# Altium PCB Power Amplifier.PcbDoc
Units mil, origin at the board's own origin, x right, y up, seen from the top; angles counter-clockwise.
Board outline 6000 x 4000 mil, 2 copper layers (Top Layer, Bottom Layer); 21 components, 15 nets, 67 pads, 0 vias.
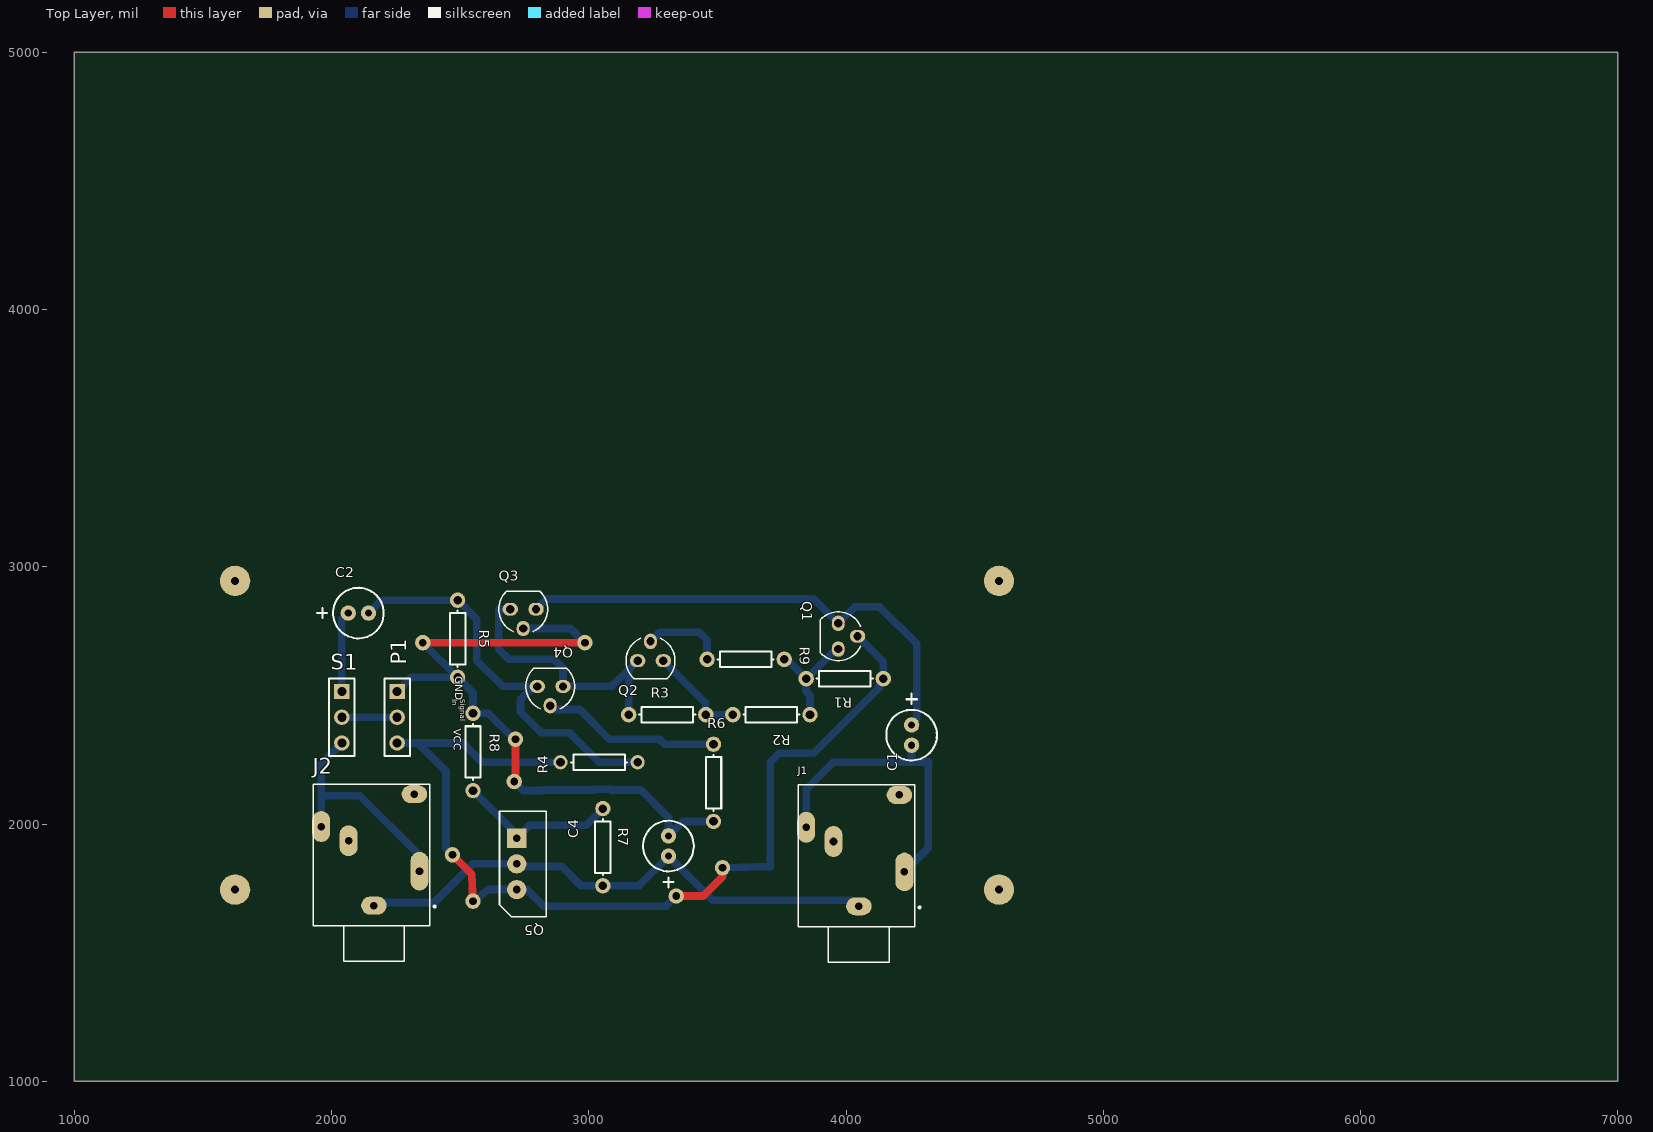
[diagram p0: Top Layer view]
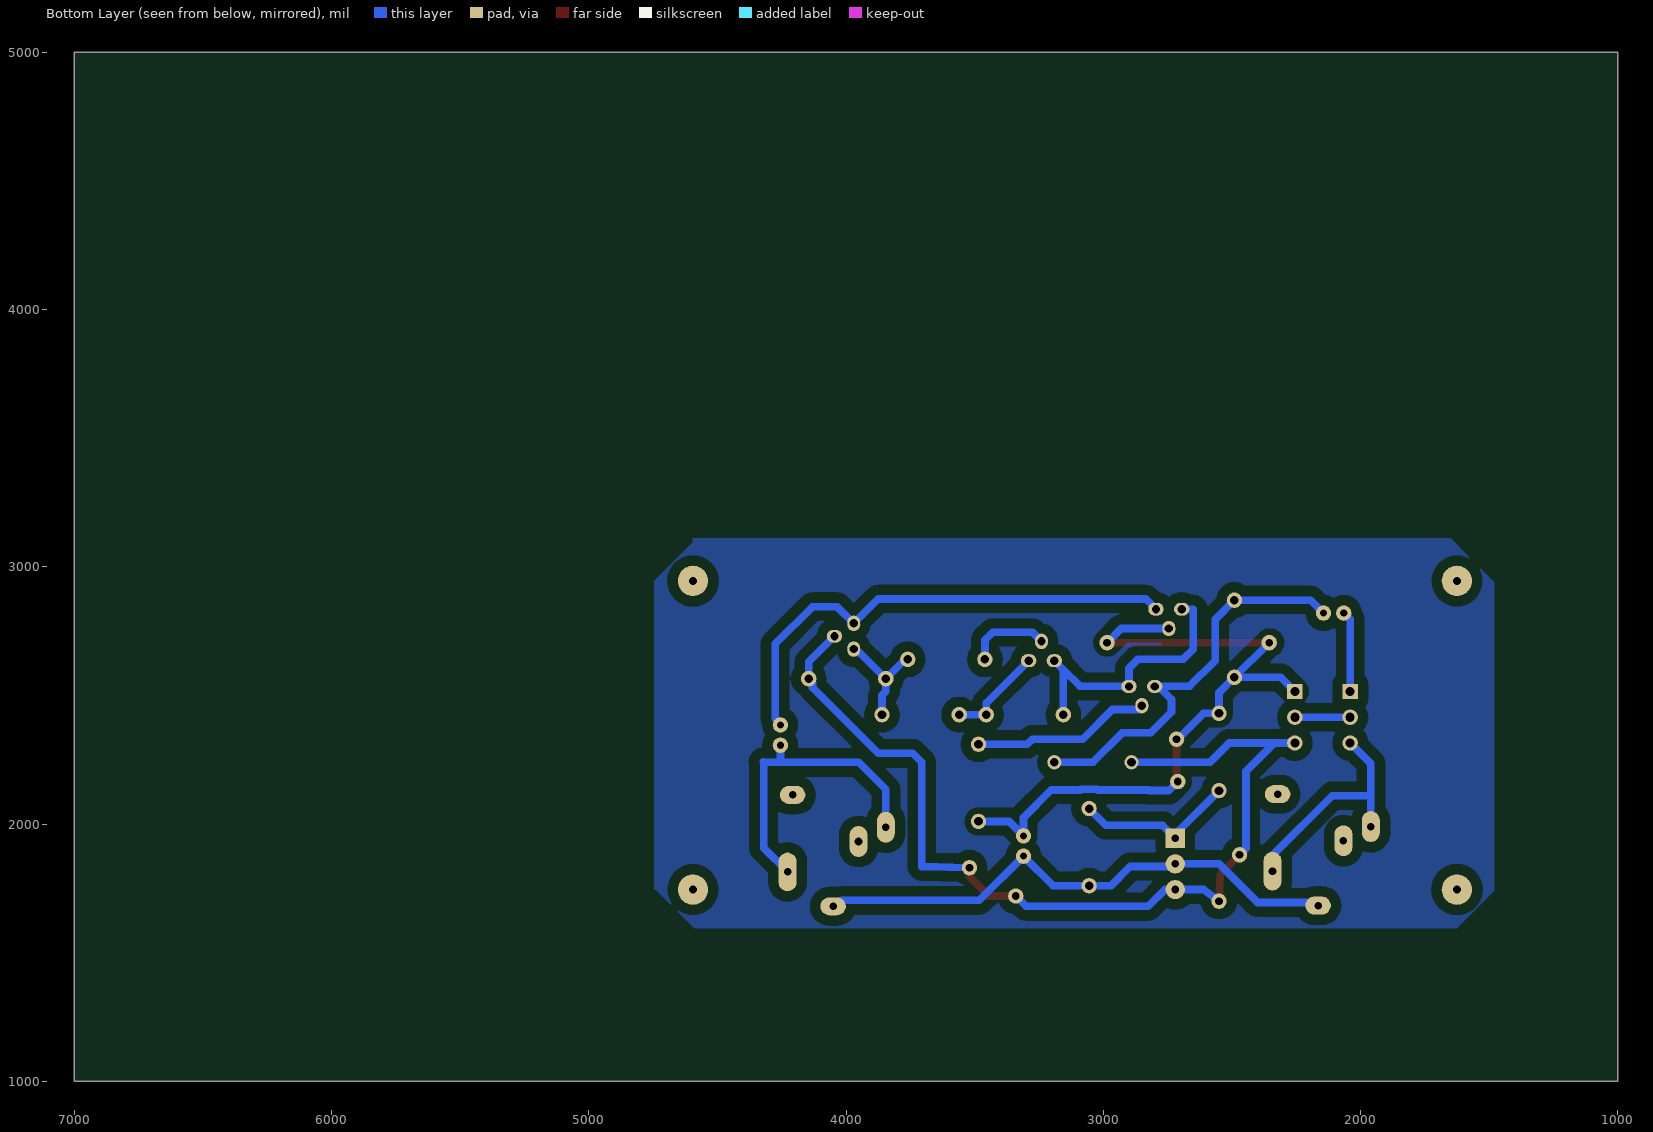
[diagram p1: Bottom Layer view, seen from below]

## Layer stack, top to bottom
Top Solder: solder mask 0.4, Solder Resist, Dk 3.5
Top Layer: signal copper 1.4
Dielectric 1: dielectric 12.6, FR-4, Dk 4.8
Bottom Layer: signal copper 1.4
Bottom Solder: solder mask 0.4, Solder Resist, Dk 3.5

## Board outline
1000,1000 7000,1000 7000,5000 1000,5000

## Design rules (kind name [scope] priority, off if disabled: settings)
Clearance [All] p1: gap=10 ignorepadtopadclearanceinfootprint=TRUE except(0: SMDPad-Hole THPad-Hole Via-Hole Fill-Hole Poly-Hole Region-Hole Text-Hole; 30: Arc-Arc Arc-Track Arc-THPad Arc-Hole Track-Track Track-THPad Track-Hole; 40: Arc-Fill Arc-Poly Arc-Region Track-Fill Track-Poly Track-Region SMDPad-Fill SMDPad-Poly SMDPad-Region THPad-Fill THPad-Poly THPad-Region Fill-Fill Fill-Poly Fill-Region Poly-Poly Poly-Region Region-Region)
PolygonConnect [All] p1: connectstyle=Relief reliefconductorwidth=10 reliefentries=4 polygonreliefangle="90 Angle" airgapwidth=10
RoomDefinition "Power Amplifier" [InComponentClass('Power Amplifier')] p1: confinementstyle=ConfineIn formatcopy=TRUE lockcomponents=FALSE outline 1435,1600 4815,1600 4815,3155 1435,3155
RoutingVias [All] p1: holewidth=28 width=50 viastyle="Through Hole" minholewidth=28 minwidth=50 maxholewidth=28 maxwidth=50
SolderMaskExpansion [All] p1: expansion=4
Width [All] p1: maxlimit=30 minlimit=30 preferedwidth=30 minimp=50.000000 maximp=50.000000 favimp=50.000000
30 further rules are at their usual default settings.

## Components (designator, comment, footprint, x,y, rotation, side; value= is the part's Value field where it differs from the comment)
C1 "Cap Pol1" "Capacitor 5mmx11mm" 4255,2385 r270 top value=100uF
C2 "Cap Pol1" "Capacitor 5mmx11mm" 2065,2820 r0 top value=1uF
C4 "Cap Pol1" "Capacitor 5mmx11mm" 3310,1875 r90 top value=4.7u
J1 "35RAPC4BH3" *SWITCHCRAFT_35RAPC4BH3 4040.16,1876.85 r90 top
J2 "35RAPC4BH3" *SWITCHCRAFT_35RAPC4BH3 2154.88,1879.76 r90 top
P1 "" HDR1X3 2255,2515 r270 top
Q1 "BC639" *SOT54D_BC639(Primary) 3970,2730 r270 top
Q2 "BC639" *SOT54D_BC639(Primary) 3240,2635 r0 top
Q3 "BC640" *SOT54D_BC640(Primary) 2745,2835 r180 top
Q4 "BC640" *SOT54D_BC640(Primary) 2850,2535 r180 top
Q5 "LM317T" TO254P450X1020X2000-3P 2768,1745 r270 top
R1 "Res1" AXIAL-0.3#1 3995,2565 r0 top value=1k
R2 "Res1" AXIAL-0.3#1 3710,2425 r0 top value=2.2k
R3 "Res1" AXIAL-0.3#1 3305,2425 r0 top value=4.7k
R4 "Res1" AXIAL-0.3#2 3040,2240 r180 top value=22k
R5 "Res1" AXIAL-0.3#1 2490,2720 r90 top value=15k
R6 "Res1" AXIAL-0.3#1 3485,2160 r90 top value=1k
R7 "560" AXIAL-0.3#1 3055,1910 r270 top value=500R
R8 "Res1" AXIAL-0.3#1 2550,2280 r270 top value=560
R9 "Res1" AXIAL-0.3#1 3610,2640 r0 top value=15k
S1 "SW-SPDT" HDR1X3 2040,2515 r270 top

## Footprints (in the part's own frame and the unit in brackets; to place one, negate y for a bottom-side part, rotate by r counter-clockwise, add the part's x,y. Pads: shape width x height; smd on the part's side, far side on the other; paste and mask are expansions set on the pad)
*SOT54D_BC639(Primary) [mil]
  oval 60x50 hole 32: B(50,0) E(-50,0)
  oval 50x60 hole 32: C(0,75)
  Top Layer region: 74.43,8.89 60.99,23.56 41.11,24.43 26.44,10.99 25.57,-8.89 39.01,-23.56 58.89,-24.43 73.56,-10.99
  Top Layer region: 24.43,83.89 10.99,98.56 -8.89,99.43 -23.56,85.99 -24.43,66.11 -10.99,51.44 8.89,50.57 23.56,64.01
  Top Layer region: -25.57,8.89 -39.01,23.56 -58.89,24.43 -73.56,10.99 -74.43,-8.89 -60.99,-23.56 -41.11,-24.43 -26.44,-10.99
  Bottom Layer region: 74.43,8.89 60.99,23.56 41.11,24.43 26.44,10.99 25.57,-8.89 39.01,-23.56 58.89,-24.43 73.56,-10.99
  Bottom Layer region: 24.43,83.89 10.99,98.56 -8.89,99.43 -23.56,85.99 -24.43,66.11 -10.99,51.44 8.89,50.57 23.56,64.01
  Bottom Layer region: -25.57,8.89 -39.01,23.56 -58.89,24.43 -73.56,10.99 -74.43,-8.89 -60.99,-23.56 -41.11,-24.43 -26.44,-10.99
  Multi-Layer region: 74.43,8.89 60.99,23.56 41.11,24.43 26.44,10.99 25.57,-8.89 39.01,-23.56 58.89,-24.43 73.56,-10.99
  Multi-Layer region: 24.43,83.89 10.99,98.56 -8.89,99.43 -23.56,85.99 -24.43,66.11 -10.99,51.44 8.89,50.57 23.56,64.01
  Multi-Layer region: -25.57,8.89 -39.01,23.56 -58.89,24.43 -73.56,10.99 -74.43,-8.89 -60.99,-23.56 -41.11,-24.43 -26.44,-10.99
  silkscreen extent -95,-70 95,87
*SOT54D_BC640(Primary) [mil] "TO, Flat Index; 3 In-Line, Axial Leads; Body Dia. 4.6mm; Leads 0.41 x 0.39 mm (max)"
  oval 60x50 hole 32: B(50,0) E(-50,0)
  oval 50x60 hole 32: C(0,75)
  Top Layer region: 74.43,8.89 60.99,23.56 41.11,24.43 26.44,10.99 25.57,-8.89 39.01,-23.56 58.89,-24.43 73.56,-10.99
  Top Layer region: 24.43,83.89 10.99,98.56 -8.89,99.43 -23.56,85.99 -24.43,66.11 -10.99,51.44 8.89,50.57 23.56,64.01
  Top Layer region: -25.57,8.89 -39.01,23.56 -58.89,24.43 -73.56,10.99 -74.43,-8.89 -60.99,-23.56 -41.11,-24.43 -26.44,-10.99
  Bottom Layer region: 74.43,8.89 60.99,23.56 41.11,24.43 26.44,10.99 25.57,-8.89 39.01,-23.56 58.89,-24.43 73.56,-10.99
  Bottom Layer region: 24.43,83.89 10.99,98.56 -8.89,99.43 -23.56,85.99 -24.43,66.11 -10.99,51.44 8.89,50.57 23.56,64.01
  Bottom Layer region: -25.57,8.89 -39.01,23.56 -58.89,24.43 -73.56,10.99 -74.43,-8.89 -60.99,-23.56 -41.11,-24.43 -26.44,-10.99
  Multi-Layer region: 74.43,8.89 60.99,23.56 41.11,24.43 26.44,10.99 25.57,-8.89 39.01,-23.56 58.89,-24.43 73.56,-10.99
  Multi-Layer region: 24.43,83.89 10.99,98.56 -8.89,99.43 -23.56,85.99 -24.43,66.11 -10.99,51.44 8.89,50.57 23.56,64.01
  Multi-Layer region: -25.57,8.89 -39.01,23.56 -58.89,24.43 -73.56,10.99 -74.43,-8.89 -60.99,-23.56 -41.11,-24.43 -26.44,-10.99
  silkscreen extent -95,-70 95,87
*SWITCHCRAFT_35RAPC4BH3 [mm]
  oval 1.778x2.516 hole 0.75: 1(-5,-0.25) 4(6,-4.25)
  oval 3.048x1.778 hole 0.75: 2(2.8,4.95) 3(1.4,2.25)
  oval 3.81x1.778 hole 0.75: 5(-1.6,-4.75)
  silkscreen extent -10.5,-6.35 7,5.75
AXIAL-0.3#1 [mil] "Axial Device, Thru-Hole; 2 Leads; 0.3 in Pin Spacing"
  round 60 hole 33.46: 1(-150,0) 2(150,0)
  silkscreen extent -109,-30 109,30
AXIAL-0.3#2 [mil] "Axial Device, Thru-Hole; 2 Leads; 0.3 in Pin Spacing"
  round 55.12 hole 33.46: 1(-150,0) 2(150,0)
  silkscreen extent -109,-30 109,30
"Capacitor 5mmx11mm" [mil]
  round 60 hole 27.56: 1(0,0) 2(78.74,0)
  silkscreen extent -122,-98 138,98
HDR1X3 [mil] "Connector; Header; 3 Position"
  rect 60x60 hole 35.43: 1(0,0)
  round 60 hole 35.43: 2(100,0) 3(200,0)
  silkscreen extent -50,-50 250,50
TO254P450X1020X2000-3P [mil]
  rect 75x75 hole 30: 1(-200,-48)
  round 75 hole 30: 2(-100,-48) 3(0,-48)
  silkscreen extent -305,-115 105,67

## Part data
C1 C2 C4: "Polarized Capacitor (Radial)", LatestRevisionDate=17-Jul-2002, LatestRevisionNote="Re-released for DXP Platform.", PackageDescription="Polarized Capacitor (Radial); 2 Leads", PackageReference=RB7.6-15, Published=8-Jun-2000, Publisher="Altium Limited"
J1 J2: "3.50mm _0.141, 1/8, Mini Plug_ - Headphone Phone Jack Stereo _3 Conductor, TRS_ Connector Solder", Package=None, Availability=Unavailable, MF="Switchcraft Inc.", MP=35RAPC4BH3, Price=None, SnapEDA_Link=https://www.snapeda.com/parts/35RAPC4BH3/Switchcraft%20Inc./view-part/621325/?ref=snap
P1: library part "Header 3", "Header, 3-Pin", LatestRevisionDate=17-Jul-2002, LatestRevisionNote="Re-released for DXP Platform.", Publisher="Altium Limited"
Q1 Q2: "Bipolar _BJT_ Transistor NPN 80V 1A 200MHz 625mW Through Hole TO-92-3", Package="TO-92 Continental Device", Availability=Unavailable, MF="ON Semiconductor", MP=BC639, Price=None, SnapEDA_Link=https://www.snapeda.com/parts/BC639/ON%20Semiconductor/view-part/761111/?ref=snap
Q3 Q4: "Bipolar _BJT_ Transistor PNP 80V 500mA 150MHz 625mW Through Hole TO-92-3", Package="TO-92 Continental Device", Availability=Unavailable, MF="ON Semiconductor", MP=BC640, Price=None, SnapEDA_Link=https://www.snapeda.com/parts/BC640/ON%20Semiconductor/view-part/2782146/?ref=snap
Q5: Package="TO-220-3 HTC Korea", Digi-Key_Part_Number=LM317T-ND, Digi-Key_Purchase_URL=https://www.digikey.lk/product-detail/en/texas-instruments/LM317T/LM317T-ND/3701346?utm_source=snapeda&utm_medium=aggregator&utm_campaign=symbol, MF="Texas Instruments", MP=LM317T, SnapEDA_Link=https://www.snapeda.com/parts/LM317T/Texas%20Instruments/view-part/?ref=snap
R1 R2 R3 R4 R5 R6 R8 R9: "Resistor", LatestRevisionDate=17-Jul-2002, LatestRevisionNote="Re-released for DXP Platform.", PackageDescription="Axial Device, Thru-Hole; 2 Leads; 0.3 in Pin Spacing", PackageReference=AXIAL-0.3, Published=8-Jun-2000, Publisher="Altium Limited"
R7: library part Res1, "Resistor", LatestRevisionDate=17-Jul-2002, LatestRevisionNote="Re-released for DXP Platform.", PackageDescription="Axial Device, Thru-Hole; 2 Leads; 0.3 in Pin Spacing", PackageReference=AXIAL-0.3, Published=8-Jun-2000, Publisher="Altium Limited"
S1: "SPDT Subminiature Toggle Switch, Right Angle Mounting, Vertical Actuation", ComponentLink1Description="Manufacturer Link", ComponentLink1URL=http://www.apem.com, DatasheetVersion=05-Dec-2000, LatestRevisionDate=17-Dec-2003, LatestRevisionNote="Schematic revised, PCB Footprint replaced.", PackageDescription="Switch; 4 Leads", PackageReference=TL36WW15050, Published=24-Mar-1999, Publisher="Altium Limited"

## Free pads (board coordinates)
  round 60 hole 30: 54(2355,2705) 55(2985,2705) 56(2715,2330) 57(2710,2165) 58(2470,1880) 59(2550,1700) 62(3520,1830) 63(3340,1720)
  round 118.11 hole 30: 64(1625,1745) 64(1625,2945) 64(4595,1745) 64(4595,2945)

## Nets (pads, with @x,y where several pads share a name; then routed paths per layer and width w, separated by ;. In a path a pad name is that pad's centre, name@x,y a point inside that pad or via, vN(x,y) a via of type N, cw(c..) or ccw(c..) an arc to the next point about the centre after c; other vN are vias at no path point)
2.5V: C4.1 J1.1 J2.1 Q5.2 R7.2 | length 2074.9
  Bottom Layer w30: J2.1 2176.81,1695 2400,1695 2550,1845 Q5.2 2730,1835 2895,1835 2970,1760 R7.2 3195,1760 C4.1 3481.97,1703.03 J1.1@4018.43,1703.03
GND: C4.2 P1.1 pad.54 pad.55 pad.56 pad.57 Q3.C R5.1 R6.1 R8.1 | length 2811.5
  Top Layer w30: pad.54 pad.55 ; pad.57 2715,2170 pad.56
  Bottom Layer w30: P1.1 2310,2570 R5.1 ; pad.54@2350,2705 pad.54 R5.1 ; pad.57 2745,2130 2820.15,2130 2822.71,2132.56 3021.49,2132.56 3023.93,2135 3086.07,2135 3088.51,2132.56 3202.44,2132.56 3310,2025 C4.2 3366.26,2010 R6.1 ; pad.56@2710,2330 2610,2430 R8.1 2550,2510 R5.1 ; Q3.C 2930,2760 pad.55
NetC1_1: C1.1 Q1.E Q3.E | length 1946.2
  Bottom Layer w30: Q3.E 2835,2875 3875,2875 Q1.E 4035,2845 4130,2845 4275,2700 4275,2410 4255,2390 C1.1
NetC1_2: C1.2 J1.2 J1.5 | length 1199.8
  Bottom Layer w30: J1.2 3845.28,2135.28 3950,2240 4255,2240 ; J1.5 4320,1906.69 4320,2240 ; C1.2 4255,2240 ; 4321.87,2241.87 4320,2240 ; 4255,2240 4320,2240
NetC2_1: C2.1 S1.1 | length 315.4
  Bottom Layer w30: S1.1 2040,2795 C2.1
NetC2_2: C2.2 Q4.B R4.1 R5.2 | length 1565.9
  Bottom Layer w30: C2.2 2193.74,2870 R5.2 2565,2795 2565,2635 2665,2535 Q4.B@2785,2535 ; Q4.B Q4.B@2785,2535 ; R4.1 3040,2240 2925,2355 2815,2355 2735,2435 2735,2485 Q4.B@2785,2535
NetJ2_2: J2.2 J2.5 S1.3 | length 898.5
  Bottom Layer w30: J2.2 1960,2112.5 ; S1.3 1960,2235 1960,2112.5 ; J2.5 2341.89,1878.11 2110,2110 1962.5,2110 1960,2112.5
NetQ1_B: Q1.B R1.1 R2.2 R9.2 | length 434.9
  Bottom Layer w30: R9.2 3770,2640 R1.1 ; R2.2 3860,2500 3845,2515 R1.1 ; Q1.B 3960,2680 R1.1
NetQ2_B: Q2.B R2.1 R3.2 | length 383.3
  Bottom Layer w30: Q2.B 3455,2470 R3.2 R2.1
NetQ2_C: Q2.C R9.1 | length 321.9
  Bottom Layer w30: Q2.C 3275,2745 3430,2745 3460,2715 R9.1
NetQ2_E: Q2.E Q3.B Q4.E R3.1 | length 1057.5
  Bottom Layer w30: Q3.B 2650,2835 2650,2680 2690,2640 2865,2640 2900,2605 Q4.E 3090,2535 3155,2600 ; R3.1 3155,2600 ; Q2.E 3155,2600
NetQ4_C: Q4.C R6.2 | length 697.1
  Bottom Layer w30: Q4.C 2865,2445 2965,2445 3080,2330 3275,2330 3295,2310 R6.2
NetQ5_1: Q5.1 R7.1 R8.2 | length 638.1
  Bottom Layer w30: R8.2 2720,1960 Q5.1 2770,1995 2990,1995 R7.1
"Signal In": P1.2 S1.2 | length 215
  Bottom Layer w30: S1.2 P1.2
VCC: P1.3 pad.58 pad.59 pad.62 pad.63 Q1.C Q5.3 R1.2 R4.2 | length 3845.6
  Top Layer w30: pad.58 2545,1805 pad.59 ; pad.63 3445,1720 3520,1795 pad.62
  Bottom Layer w30: P1.3 2335,2315 ; pad.58 2445,1905 2445,2205 2335,2315 ; pad.59 2609.85,1745 Q5.3 2760,1745 2825,1680 3300,1680 pad.63 ; R4.2 2585,2240 2510,2315 2335,2315 ; pad.62 3705,1835 3705,2240 3740,2275 3875,2275 4130,2530 4130,2550 R1.2 4145,2630 Q1.C
pads on no net: J1.3 J1.4 J2.3 J2.4

## Polygon pours and split planes (outlines as drawn)
GND on Bottom Layer "Bottom Layer- GND" (solid, pour order 4): 1625,1595 4590,1595 4740,1745 4745,1745 4745,2945 4595,3095 4595,3110 1650,3110 1480,2940 1480,1740

## Silkscreen, mask and mechanical layers (free items; w line width, h text height)
Top Overlay:
  text "GND" at 2480,2575 h30 r270
  text "Signal / In" at 2470,2485 h20 r270
  text "VCC" at 2475,2370 h30 r270